# Allegro board ADF4351_PCB.brd
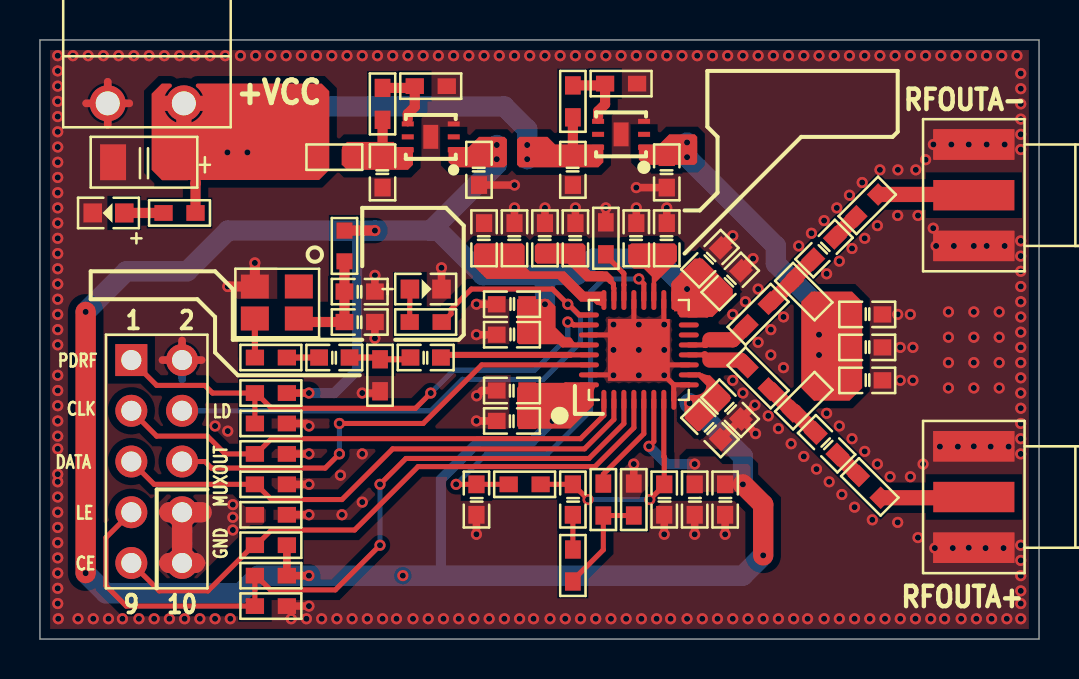
[diagram p0: board, top side]
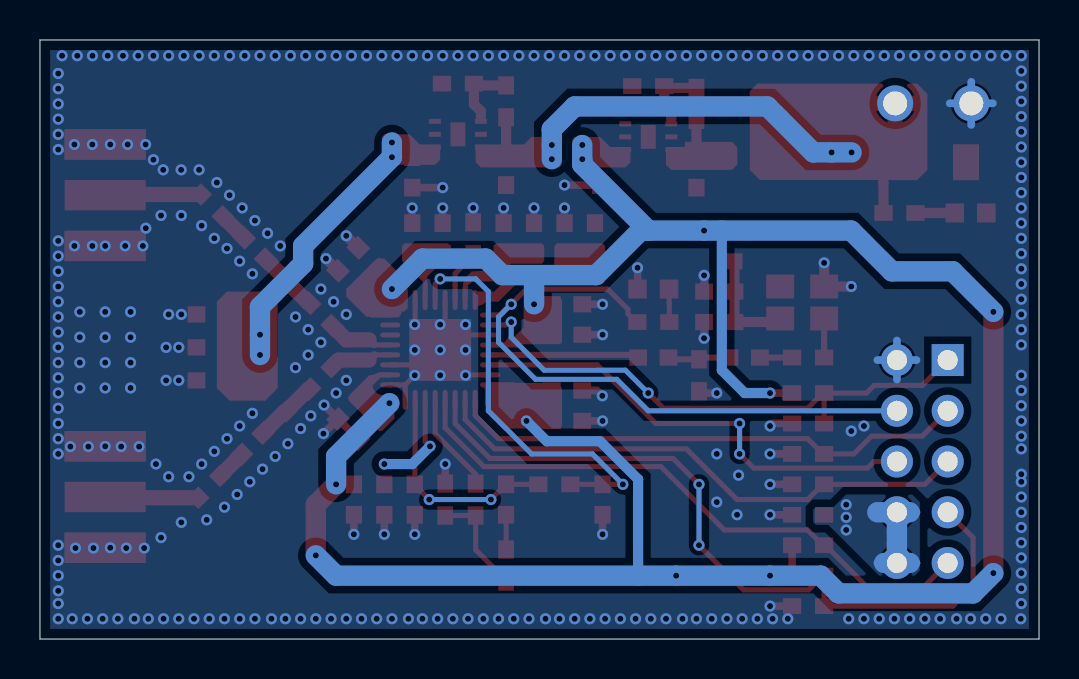
[diagram p1: board, bottom side, seen from below]

Outline 50 x 30 mm; copper layers: TOP, BOTTOM. Coordinates in mm from the lower left corner of the outline.
Outline path: 0,30 0,0 50,0 50,30 0,30

## Design rules (mm)
net group PWR: nets N01903 VCC_5V VOUT

## Placement (name value [footprint] x y rotation side)
BNC1  BNC  [BNC5_2R54_7R7_SM_V]  46.74 7.11 180 top
BNC2  BNC  [BNC5_2R54_7R7_SM_V]  46.74 22.23 180 top
C1  0.47uF/C0603  [C0603]  26.67 23.5 270 top
C2  0.47uF/C0603  [C0603]  31.37 23.37 270 top
C3  22uF 16V/TA3216  [TA3216]  5.21 23.88 180 top
C4  0.47uF/C0603  [C0603]  17.14 23.37 270 top
C5  0.47uF/C0603  [C0603]  21.97 23.5 270 top
C6  1uF/C0603  [C0603]  16 17.4 0 top
C7  100pF/C0603  [C0603]  16 15.88 0 top
C8  1nF/C0603  [C0603]  14.73 14.1 0 top
C9  1nF/C0603  [C0603]  19.3 14.1 0 top
C10  680pF/C0603  [C0603]  21.84 6.99 90 top
C11  47nF/C0603  [C0603]  26.67 6.99 90 top
C12  2.7nF/C0603  [C0603]  31.24 6.99 90 top
C13  10pF/C0603  [C0603]  23.62 12.45 0 top
C14  0.1uF/C0603  [C0603]  23.62 10.92 0 top
C15  10pF/C0603  [C0603]  34.54 11.56 135 top
C16  0.1uF/C0603  [C0603]  33.53 10.54 135 top
C17  120pF/C0603  [C0603]  41.4 12.95 180 top
C18  0.1uF/C0603  [C0603]  41.4 14.61 180 top
C19  120pF/C0603  [C0603]  41.4 16.26 180 top
C20  1nF/C0603  [C0603]  39.24 19.56 225 top
C21  1nF/C0603  [C0603]  39.37 9.78 135 top
C22  0.1uF/C0603  [C0603]  31.37 20.07 270 top
C23  10pF/C0603  [C0603]  29.84 20.07 270 top
C24  0.1uF/C0603  [C0603]  26.8 20.07 270 top
C25  10pF/C0603  [C0603]  25.27 20.07 270 top
C26  0.1uF/C0603  [C0603]  23.75 20.07 270 top
C27  10pF/C0603  [C0603]  22.23 20.07 270 top
C28  0.1uF/C0603  [C0603]  33.53 19.05 225 top
C29  10pF/C0603  [C0603]  34.54 17.91 225 top
C30  0.1uF/C0603  [C0603]  34.29 6.99 90 top
C31  10pF/C0603  [C0603]  32.77 6.99 90 top
C32  10pF/C0603  [C0603]  23.62 15.24 180 top
C33  0.1uF/C0603  [C0603]  23.62 16.76 180 top
D1  LED  [LED0603]  19.3 17.53 0 top
D2  LED  [LED0603]  3.43 21.34 180 top
J1  PWR  [KF_2EDG_3_81X2]  9.55 25.63 180 top
J2  HEADER 5X2  [HDR_2X5]  4.57 13.97 270 top
L2  3.9nH  [L0603]  38.23 17.4 315 top
L3  3.9nH  [L0603]  38.23 11.94 45 top
L4  1.9nH  [L0603]  41.4 21.72 45 top
L5  1.9nH  [L0603]  41.53 7.62 315 top
LB1  600R/L0603  [L0603]  14.73 24.13 0 top
LB2  600R  [L0603]  15.24 19.68 90 top
NOREF  -  []  50 0 90 top
NOREF#2  -  []  0 0 0 top
R1  0R  [R0603]  26.67 26.92 90 top
R2  DNI  [R0603]  29.08 27.81 0 top
R3  0R  [R0603]  17.14 26.8 90 top
R4  DNI  [R0603]  19.56 27.69 0 top
R5  10K  [R0603]  11.56 1.65 0 top
R6  10K  [R0603]  11.56 7.75 0 top
R7  10K  [R0603]  11.56 9.27 0 top
R8  10K  [R0603]  11.56 4.7 180 top
R9  DIN  [R0603]  11.56 3.17 180 top
R10  0R  [R0603]  11.56 14.1 0 top
R11  DIN/51R  [R0603]  17.02 13.21 90 top
R12  1K  [R0603]  24.26 7.75 0 top
R13  360R  [R0603]  26.67 3.68 90 top
R14  0R  [R0603]  29.72 6.99 90 top
R15  DIN  [R0603]  28.19 6.99 270 top
R16  1K  [R0603]  19.3 15.88 0 top
R17  0R  [R0603]  35.94 16.26 45 top
R18  0R  [R0603]  35.94 13.08 315 top
R19  4K7  [R0603]  28.32 20.07 90 top
R20  DIN  [R0603]  11.56 10.79 0 top
R21  0R  [R0603]  11.56 12.32 0 top
R22  5K1  [R0603]  6.99 21.34 180 top
R23  0R  [R0603]  11.56 6.22 0 top
U1  LP5900SD-3V3/QFN-6  [QFN-6]  29.08 25.27 270 top
U2  LP5900SD-3V3/QFN-6  [QFN-6]  19.56 25.15 270 top
U3  ADF4351  [QFN-32]  29.97 14.48 90 top
Y1  100MHz  [CRY_3225]  12.95 17.65 180 top

## Library data of the parts
BNC1 BNC2 = BNC
C1 C2 C4-C33 = CAP NP
C3 = CAP POL
D1 D2 = LED
J1 = HEADER 2
J2 = HEADER 5X2
L2-L5 = INDUCTANCE
LB1 LB2 = FB
R1-R23 = R
U1 U2 = LP5900SD-3V3
U3 = ADF4351_0
Y1 = XTAL_SMD

## Footprints (pads in the part's own frame, mm; a bottom-side part is the same pattern mirrored in y, then rotated)
BNC5_2R54_7R7_SM_V
  rect 4.059x1.519 smd: 1(0,0) 2(0,2.54) 3(0,-2.54) 4(0,2.54) 5(0,-2.54)
C0603
  rect 0.889x0.813 smd: 1(-0.762,0) 2(0.762,0)
CRY_3225
  rect 1.4x1.199 smd: 1(0,0) 2(2.2,0) 3(2.2,1.6) 4(0,1.6)
HDR_2X5
  rect 1.6x1.6 hole 1.001: 1(0,0)
  round 1.6 hole 1.001: 2(0,2.54) 3(2.54,0) 4(2.54,2.54) 5(5.08,0) 6(5.08,2.54) 7(7.62,0) 8(7.62,2.54) 9(10.16,0) 10(10.16,2.54)
KF_2EDG_3_81X2
  round 1.801 hole 1.199: 1(2.344,-1.199) 2(6.154,-1.199)
L0603
  rect 0.8x0.8 smd: 1(-0.77,0) 2(0.77,0)
LED0603
  rect 0.93x0.95 smd: 1(-0.79,0) 2(0.79,0)
QFN-6
  rect 0.249x0.599 smd: 1(0.65,1.151) 2(0,1.151) 3(-0.65,1.151) 4(-0.65,-1.151) 5(0,-1.151) 6(0.65,-1.151)
  rect 1.199x0.749 smd: 7(0,0)
QFN-32
  oval 1.001x0.249 smd: 1(-2.499,1.75) 2(-2.499,1.25) 3(-2.499,0.749) 4(-2.499,0.249) 5(-2.499,-0.249) 6(-2.499,-0.749) 7(-2.499,-1.25) 8(-2.499,-1.75) 17(2.499,-1.75) 18(2.499,-1.25) 19(2.499,-0.749) 20(2.499,-0.249) 21(2.499,0.249) 22(2.499,0.749) 23(2.499,1.25) 24(2.499,1.75)
  oval 0.249x1.001 smd: 9(-1.75,-2.499) 10(-1.25,-2.499) 11(-0.749,-2.499) 12(-0.249,-2.499) 13(0.249,-2.499) 14(0.749,-2.499) 15(1.25,-2.499) 16(1.75,-2.499) 25(1.75,2.499) 26(1.25,2.499) 27(0.749,2.499) 28(0.249,2.499) 29(-0.249,2.499) 30(-0.749,2.499) 31(-1.25,2.499) 32(-1.75,2.499)
  rect 3.099x3.099 smd: 33(0,0)
R0603
  rect 0.914x0.787 smd: 1(-0.8,0) 2(0.8,0)
TA3216
  rect 1.3x1.801 smd: 1(-1.549,0) 2(1.549,0)

## Nets
AGND: J2.8 J2.10 R23.1
AVDD: C5.1 C13.2 C14.2 C15.2 C16.2 C28.2 C29.2 C30.2 C31.2 C32.1 C33.1 LB2.2 R8.1 R9.1 R21.2 U2.1(VOUT) U3.6(VP) U3.10(AVDD) U3.16(VVCO#16) U3.17(VVCO#17) U3.28(DVDD) U3.32(SDVDD)
GND: BNC1.2(GND#2) BNC1.3(GND#3) BNC1.4(GND#4) BNC1.5(GND#5) BNC2.2(GND#2) BNC2.3(GND#3) BNC2.4(GND#4) BNC2.5(GND#5) C1.2 C2.2 C3.2 C4.2 C5.2 C6.2 C7.2 C10.1 C12.1 C13.1 C14.1 C15.1 C16.1 C17.1 C18.1 C19.1 C22.1 C23.1 C24.1 C25.1 C26.1 C27.1 C28.1 C29.1 C30.1 C31.1 C32.2 C33.2 D1.2(K) D2.2(K) J1.2 J2.2 R2.2 R4.2 R5.2 R6.2 R7.2 R11.1 R14.2 R19.2 R20.2 R23.2 U1.3(GND) U1.7(PGND) U2.3(GND) U2.7(PGND) U3.8(CPGND) U3.9(AGND) U3.11(AGNDVCO#11) U3.18(AGNDVCO#18) U3.21(AGNDVCO#21) U3.27(DGND) U3.31(SDGND) U3.33(EP) Y1.2(GND)
VCC_5V: C1.1 C3.1 J1.1 LB1.1 R1.1 R22.1 U1.6(VIN)
CE: J2.9 R8.2 U3.4(CE)
CLK: J2.3 R7.1 U3.1(CLK)
DATA: J2.5 R6.1 U3.2(DATA)
LD: J2.4 R16.2 U3.25(LD)
LE: J2.7 R5.1 R9.2 U3.3(LE)
MUXOUT: J2.6 U3.30(MUXOUT)
PDRF: J2.1 R20.1 R21.1 U3.26(PDBRF)
VOUT: C2.1 C17.2 C18.2 C19.2 L2.2 L3.2 U1.1(VOUT)
VTURE: C10.2 R12.1 U3.20(VTUNE)
N00255: R1.2 R2.1 U1.4(EN)
N01903: C4.1 LB1.2 R3.1 U2.6(VIN)
N01947: R3.2 R4.1 U2.4(EN)
N05770: C6.1 C7.1 LB2.1 Y1.4(VDD)
N06260: R10.1 Y1.3(OUT)
N06365: C8.1 R10.2
N06469: C8.2 C9.1 R11.2
N07492: C26.2 C27.2 U3.24(VREF)
N07512: R18.1 U3.12(RFOUT_A+)
N07516: R17.1 U3.13(RFOUT_A-)
N07532: C11.2 C12.2 R12.2 U3.7(CPOUT)
N08642: C11.1 R13.2
N09181: R13.1 R14.1 R15.2
N09630: R15.1 U3.5(SW)
N10048: C9.2 U3.29(REFIN)
N12021: D1.1(A) R16.1
N15465: C20.2 L2.1 R17.2
N15469: C21.2 L3.1 R18.2
N16989: C20.1 L4.1
N16993: C21.1 L5.1
N18121: BNC1.1 L5.2
N18593: BNC2.1 L4.2
N20810: C22.2 C23.2 U3.19(TEMP)
N21612: C24.2 C25.2 U3.23(VCOM)
N23952: R19.1 U3.22(RSET)
N29164: D2.1(A) R22.2

Pads without a net: U1 2 5; U2 2 5; U3 14 15; Y1 1

## Via types
v1: diameter 0.559, hole 0.305, TOP to BOTTOM, 356 vias

## Routing (per net, layer and track width the routed paths; a pad name or vN(x,y) marks a point on that pad's centre or on a via; arc(x,y) is an arc through that point)
AGND: length 12.9
  TOP w0.381: 8.09,3.81 7.75,3.81 ; 6.13,6.35 6.48,6.35 ; 6.13,3.81 6.48,3.81
  TOP w1.016: J2.8 8.09,6.35 ; J2.8 6.48,6.35 ; J2.8 J2.10 ; 7.75,3.81 J2.10 ; J2.10 6.48,3.81
  BOTTOM w0.381: 6.48,3.81 6.13,3.81 ; 6.48,6.35 6.13,6.35 ; 7.75,3.81 8.09,3.81
  BOTTOM w1.016: J2.8 J2.10 ; J2.8 8.09,6.35 ; J2.8 6.48,6.35 ; J2.10 6.48,3.81 ; J2.10 7.75,3.81
  vias: v1(9.65,6.73) v1(9.65,6.1) v1(9.65,5.46)
AVDD: length 137.3
  TOP w0.254: U3.17 31.72,17.75 31.88,17.91 ; 33.66,16.51 33.37,16.23 U3.16 ; C15.2 33.51,12.59 33.51,12.72 33,13.23 U3.10 ; v1(30.48,9.65) 30.72,9.89 U3.6 ; 26.16,12.57 26.32,12.73 U3.32 ; 25.97,14.92 26.17,14.73 U3.28
  TOP w0.381: R21.2 v1(13.46,12.32) ; R8.1 R9.1 v1(13.46,3.17)
  TOP w0.508: LB2.2 v1(16.76,20.45)
  TOP w1.016: v1(2.29,16.38) v1(2.29,3.3) ; v1(36.2,4.19) 36.2,6.73 v1(35.18,7.75)
  BOTTOM w0.508: v1(13.46,12.32) 14.73,12.32 15.88,13.46 15.88,20.45 ; v1(32.77,8.76) 31.37,8.76 v1(30.48,9.65) ; v1(25.65,10.92) 24.64,9.91 21.97,9.91 20.07,8 20.07,3.17
  BOTTOM w1.016: 19.55,20.45 22.86,23.76 v1(22.86,24.03) v1(22.86,24.74) ; 19.55,20.45 v1(16.76,20.45) 9.41,20.45 7.37,18.41 4.32,18.41 v1(2.29,16.38) ; 19.55,20.45 19.93,20.45 22.16,18.22 25.27,18.22 ; v1(2.29,3.3) 3.3,2.29 10.03,2.29 10.92,3.17 v1(13.46,3.17) v1(18.16,3.17) 35.18,3.17 v1(36.2,4.19) ; v1(32.38,17.53) 30.86,19.05 27.69,19.05 26.86,18.22 25.27,18.22 ; 25.27,18.22 v1(25.27,16.76) ; v1(35.18,7.75) 35.18,9.14 v1(32.51,11.81)
GND: length 65.8
  TOP w0.254: 31.72,12.73 31.72,11.98 U3.8 ; 31.72,12.73 32.47,12.73 U3.9 ; 31.72,12.73 v1(31.24,13.21) 30.72,13.73 ; v1(29.97,14.48) 29.72,14.73 ; v1(29.97,14.48) 28.72,13.23 U3.31 ; v1(29.97,14.48) 30.72,13.73 ; v1(29.97,14.48) 31.22,15.73 U3.18 ; 29.72,14.73 U3.21 ; 29.72,14.73 29.22,15.23 U3.27 ; 30.72,13.73 U3.11
  TOP w0.381: J1.2 3.39,27.9 ; J1.2 3.39,25.75 ; J1.2 4.47,26.82 ; J1.2 2.31,26.82 ; 20.09,17.78 v1(20.09,18.59) ; R20.2 13.34,10.79 v1(13.46,10.67) ; R23.2 v1(13.46,6.22) ; J2.2 8.09,13.97 ; J2.2 7.11,14.95 ; J2.2 6.13,13.97 ; C16.1 C15.1 ; C15.1 v1(35.78,11.72) ; C15.1 v1(35.81,10.29) ; C7.2 v1(16.76,15.06) ; C5.2 v1(23.75,22.73) ; C26.1 v1(23.75,21.59) ; C13.1 22.12,12.45 v1(21.86,12.18) ; C25.1 v1(25.27,21.59) ; C30.1 v1(34.29,5.25) ; C33.2 v1(21.84,16.76) ; R5.2 v1(13.46,1.65) ; v1(16.13,12.32) 16.93,12.32 R11.1 ; C22.1 v1(31.37,21.59) ; C14.1 v1(21.84,10.92) ; C6.2 v1(16.76,18.21) ; R19.2 v1(28.32,21.59) ; C10.1 v1(21.84,5.25) ; C24.1 v1(26.8,21.59) ; C12.1 v1(31.24,5.25) ; R7.2 v1(13.46,9.27) ; C23.1 v1(29.84,21.59) ; C2.2 v1(29.84,22.61) ; R14.2 v1(29.72,8.76) ; R6.2 v1(13.46,7.75) ; C31.1 v1(32.77,5.25) ; C32.2 v1(21.84,15.24)
  TOP w0.508: C28.1 v1(34.67,20.19) ; v1(10.75,18.84) Y1.2 v1(9.4,17.65) ; C29.1 v1(35.69,19.05)
  BOTTOM w0.381: J1.2 4.47,26.82 ; J1.2 2.31,26.82 ; J1.2 3.39,25.75 ; J1.2 3.39,27.9 ; 7.11,12.99 J2.2 ; J2.2 7.11,14.95 ; J2.2 6.13,13.97 ; J2.2 8.09,13.97
  vias: v1(0.89,29.21) v1(0.89,28.45) v1(0.89,27.69) v1(0.89,26.92) v1(0.89,26.16) v1(0.89,25.4) v1(0.89,24.64) v1(0.89,23.88) v1(0.89,23.11) v1(0.89,22.35) v1(0.89,21.59) v1(0.89,20.83) v1(0.89,20.07) v1(0.89,19.3) v1(0.89,18.54) v1(0.89,17.78) v1(0.89,17.02) v1(0.89,16.26) v1(0.89,15.49) v1(0.89,14.73) v1(0.89,13.21) v1(0.89,12.45) v1(0.89,11.68) v1(0.89,10.92) v1(0.89,10.16) v1(0.89,9.53) v1(0.89,8.26) v1(0.89,7.87) v1(0.89,7.11) v1(0.89,6.35) v1(0.89,5.59) v1(0.89,4.83) v1(0.89,4.06) v1(0.89,3.3) v1(0.89,2.54) v1(0.89,1.78) v1(0.91,1.02) v1(1.65,29.21) v1(1.91,1.02) v1(2.41,29.21) v1(2.67,1.02) v1(3.17,29.21) v1(3.43,1.02) v1(3.94,29.21) v1(4.13,1.02) v1(4.7,29.21) v1(4.95,1.02) v1(5.46,29.21) v1(5.71,1.02) v1(6.22,29.21) v1(6.48,1.02) v1(6.99,29.21) v1(7.24,1.02) v1(7.75,29.21) v1(8,1.02) v1(8.51,29.21) v1(8.76,10.67) v1(8.76,1.02) v1(9.27,29.21) v1(9.4,10.41) v1(9.53,1.02) v1(10.03,29.21) v1(10.79,29.21) v1(11.56,29.21) v1(12.32,29.21) v1(12.57,1.02) v1(13.08,29.21) v1(13.34,1.02) v1(13.84,29.21) v1(14.1,1.02) v1(14.61,29.21) v1(14.86,1.02) v1(15.04,8.2) v1(15.11,6.22) v1(15.37,29.21) v1(15.62,1.02) v1(16.13,29.21) v1(16.13,9.27) v1(16.13,6.86) v1(16.38,1.02) v1(16.89,29.21) v1(17.14,1.02) v1(17.65,29.21) v1(17.84,1.02) v1(18.41,29.21) v1(18.67,1.02) v1(19.18,29.21) v1(19.43,1.02) v1(19.94,29.21) v1(20.19,1.02) v1(20.7,29.21) v1(20.95,1.02) v1(21.46,29.21) v1(21.72,1.02) v1(22.23,29.21) v1(22.48,1.02) v1(22.99,29.21) v1(23.24,1.02) v1(23.75,29.21) v1(24,1.02) v1(24.51,29.21) v1(24.7,1.02) v1(25.27,29.21) v1(25.53,1.02) v1(26.04,29.21) v1(26.29,1.02) v1(26.8,29.21) v1(27.05,1.02) v1(27.56,29.21) v1(27.81,1.02) v1(28.32,29.21) v1(28.57,1.02) v1(28.7,15.75) v1(28.7,14.48) v1(28.7,13.21) v1(29.08,29.21) v1(29.34,1.02) v1(29.84,29.21) v1(29.97,15.75) v1(29.97,13.21) v1(30.1,1.02) v1(30.61,29.21) v1(30.86,1.02) v1(31.24,15.75) v1(31.24,14.48) v1(31.37,29.21) v1(31.56,1.02) v1(32.13,29.21) v1(32.38,1.02) v1(32.89,29.21) v1(33.15,1.02) v1(33.66,29.21) v1(33.91,1.02) v1(34.42,29.21) v1(34.67,16.26) v1(34.67,12.95) v1(34.67,1.02) v1(35.18,29.21) v1(35.18,12.32) v1(35.31,16.89) v1(35.43,1.02) v1(35.94,29.21) v1(35.94,17.53) v1(35.94,14.86) v1(36.2,1.02) v1(36.45,11.18) v1(36.58,15.49) v1(36.58,14.22) v1(36.7,29.21) v1(36.96,10.54) v1(36.96,1.02) v1(37.21,16.13) v1(37.21,13.59) v1(37.47,29.21) v1(37.59,9.78) v1(37.72,1.02) v1(37.97,19.68) v1(38.23,29.21) v1(38.23,9.14) v1(38.42,1.02) v1(38.61,20.32) v1(38.86,8.51) v1(38.99,29.21) v1(39.24,20.95) v1(39.24,1.02) v1(39.37,18.29) v1(39.37,11.3) v1(39.5,7.87) v1(39.75,29.21) v1(39.88,21.59) v1(40.01,18.92) v1(40.01,10.67) v1(40.01,1.02) v1(40.13,7.24) v1(40.51,29.21) v1(40.51,22.23) v1(40.64,19.56) v1(40.64,10.03) v1(40.77,6.6) v1(40.77,1.02) v1(41.15,22.86) v1(41.27,29.21) v1(41.27,20.07) v1(41.27,9.4) v1(41.53,1.02) v1(41.66,5.97) v1(41.91,20.7) v1(41.91,8.76) v1(42.04,29.21) v1(42.04,23.5) v1(42.29,1.02) v1(42.55,8.13) v1(42.8,29.21) v1(42.94,23.5) v1(42.93,21.21) v1(42.93,16.26) v1(42.93,5.84) v1(43.05,14.61) v1(43.05,12.95) v1(43.05,1.02) v1(43.56,29.21) v1(43.56,16.26) v1(43.56,8.13) v1(43.69,14.61) v1(43.69,12.95) v1(43.83,23.5) v1(43.81,1.02) v1(43.94,21.21) v1(43.94,5.08) v1(44.2,8.76) v1(44.32,29.21) v1(44.32,24) v1(44.58,1.02) v1(44.71,24.77) v1(44.7,20.57) v1(44.85,19.68) v1(44.78,4.56) v1(45.04,9.64) v1(45.09,29.21) v1(45.28,1.02) v1(45.47,16.38) v1(45.47,15.11) v1(45.47,13.84) v1(45.47,12.57) v1(45.61,24.77) v1(45.74,19.68) v1(45.68,4.56) v1(45.85,29.21) v1(45.94,9.64) v1(46.1,1.02) v1(46.48,24.77) v1(46.48,4.57) v1(46.61,29.21) v1(46.74,19.68) v1(46.74,16.38) v1(46.74,15.11) v1(46.74,13.84) v1(46.74,12.57) v1(46.74,9.65) v1(46.86,1.02) v1(47.32,4.56) v1(47.37,29.21) v1(47.38,24.77) v1(47.38,19.68) v1(47.58,9.64) v1(47.62,1.02) v1(48.01,16.38) v1(48.01,15.11) v1(48.01,13.84) v1(48.01,12.57) v1(48.13,29.21) v1(48.22,4.56) v1(48.28,24.77) v1(48.28,19.68) v1(48.39,1.02) v1(48.48,9.64) v1(48.9,29.21) v1(49.09,28.32) v1(49.09,27.56) v1(49.09,26.8) v1(49.09,26.04) v1(49.09,25.27) v1(49.09,24.51) v1(49.09,19.94) v1(49.09,19.18) v1(49.09,18.41) v1(49.09,17.65) v1(49.09,16.89) v1(49.09,16.13) v1(49.09,15.37) v1(49.09,14.61) v1(49.09,13.84) v1(49.09,13.08) v1(49.09,12.32) v1(49.09,11.56) v1(49.09,10.79) v1(49.09,10.03) v1(49.09,9.27) v1(49.09,4.7) v1(49.09,3.94) v1(49.09,3.17) v1(49.09,2.41) v1(49.09,1.78) v1(49.09,1.02)
VCC_5V: length 25.1
  TOP w0.508: C1.1 R1.1 ; R22.1 7.79,22.82 7.79,22.82 7.79,23.28 7.87,23.37
  TOP w0.762: J1.1 7.2,25.75 ; J1.1 6.12,26.82 ; J1.1 8.28,26.82
  BOTTOM w1.016: v1(24.38,24.03) v1(24.38,24.74) 24.38,25.53 23.24,26.67 13.6,26.67 11.3,24.37 v1(10.38,24.37) v1(9.38,24.37)
CE: length 30.5
  TOP w0.254: J2.9 5.97,2.41 8.41,2.41 10.69,4.7 R8.2 10.82,4.7 11.58,5.46 15.75,5.46 18.92,8.64 27.78,8.64 29.72,10.58 U3.4
CLK: length 26.1
  TOP w0.254: J2.3 5.84,10.16 8.38,10.16 9.27,9.27 R7.1 10.82,9.27 11.58,10.03 27.05,10.03 28.22,11.2 U3.1
DATA: length 27.6
  TOP w0.254: U3.2 28.72,11 27.25,9.53 17.65,9.53 15.11,6.99 11.58,6.99 10.82,7.75 R6.1 5.71,7.75 J2.5
LD: length 32.3
  TOP w0.254: R16.2 20.17,15.88 20.57,16.28 20.57,16.51 21.59,17.53 25.65,17.53 v1(26.42,16.76) 26.46,16.76 27,16.23 U3.25
  BOTTOM w0.254: J2.4 19.56,11.43 21.13,13 25.2,13 27.05,14.86 27.05,16.13 v1(26.42,16.76)
LE: length 38.8
  TOP w0.254: v1(17.02,7.75) 18.31,9.04 27.48,9.04 29.22,10.79 U3.3 ; J2.7 3.3,5.08 3.3,2.67 4.32,1.65 R5.1 R9.2 10.82,3.17 11.53,2.46 14.78,2.46 v1(17.02,4.7)
  BOTTOM w0.254: v1(17.02,4.7) v1(17.02,7.75)
MUXOUT: length 23.5
  TOP w0.254: U3.30 22.11,13.73 19.18,10.79 v1(14.99,10.79) ; J2.6 8.26,8.89 8.58,8.56 14.28,8.56 v1(14.99,9.27)
  BOTTOM w0.254: v1(14.99,9.27) v1(14.99,10.79)
PDRF: length 27.7
  TOP w0.254: R21.1 10.82,12.32 11.58,11.56 18.8,11.56 v1(19.56,12.32) ; R21.1 R20.1 ; R21.1 8.64,12.32 8.26,12.7 5.84,12.7 J2.1 ; U3.26 26.71,15.73 26.69,15.75 26.67,15.75 26.54,15.88 v1(26.42,15.88)
  BOTTOM w0.254: v1(19.56,12.32) 20.7,13.46 24.77,13.46 26.42,15.11 v1(26.42,15.88)
VOUT: length 13.4
  BOTTOM w1.016: v1(38.99,14.22) v1(38.99,15.24) 38.99,16.64 36.83,18.8 36.83,19.68 v1(32.38,24.13) v1(32.38,24.87)
VTURE: length 20.7
  TOP w0.254: v1(29.97,18.03) 30.22,17.79 U3.20 ; R12.1 C10.2 v1(20.83,7.75)
  BOTTOM w0.254: v1(29.97,18.03) 28.19,18.03 27.56,17.4 27.56,11.43 25.4,9.27 22.35,9.27 v1(20.83,7.75)
N00255: length 3.7
  TOP w0.254: U1.4 27.93,26.16
  TOP w0.508: R1.2 28.19,27.72 R2.1 28.28,26.78 27.93,26.43 27.93,26.16
N01903: length 1.4
  TOP w0.508: 17.14,24.64 R3.1
N01947: length 3.7
  TOP w0.254: U2.4 18.41,26.04
  TOP w0.508: 18.41,26.04 18.41,26.3 18.76,26.65 R4.1 18.67,27.6 R3.2
N05770: length 5.4
  TOP w0.508: LB2.1 C6.1 C7.1 13.13,15.88 Y1.4
N06260: length 2
  TOP w0.305: Y1.3 10.75,14.77 10.76,14.77 R10.1
N06365: length 1.6
  TOP w0.305: R10.2 C8.1
N06469: length 3.1
  TOP w0.305: C9.1 18.45,14.01 R11.2 16.93,14.1 C8.2
N07492: length 0.4
  TOP w0.254: U3.24 27.85,16.98
N07512: length 3.1
  TOP w0.254: 33.27,14.23 U3.12
  TOP w0.381: 33.53,13.97 33.27,14.23
  TOP w0.762: R18.1 35.05,13.97 33.53,13.97
N07516: length 3.3
  TOP w0.254: 33.29,14.76 33.26,14.76 33.23,14.73 U3.13
  TOP w0.381: 33.53,14.99 33.3,14.76 33.29,14.76
  TOP w0.762: R17.1 34.67,14.99 33.53,14.99
N07532: length 11.1
  TOP w0.254: R12.2 C11.2 v1(27.43,6.99) ; U3.7 31.22,9.14 31.24,9.12 C12.2 31.24,7.71 v1(30.52,6.99)
  BOTTOM w0.254: v1(27.43,6.99) v1(30.52,6.99)
N08642: length 1.7
  TOP w0.254: C11.1 R13.2
N09181: length 5.5
  TOP w0.254: R14.1 R15.2 28.19,4.47 26.67,2.95 R13.1
N09630: length 5
  TOP w0.254: R15.1 28.19,8.26 30.22,10.28 U3.5
N10048: length 7.5
  TOP w0.254: 26.54,14.23 U3.29
  TOP w0.305: 26.54,14.23 20.2,14.23 C9.2
N12021: length 1.7
  TOP w0.254: R16.1 18.5,16.79 18.51,16.8 D1.1
N15465: length 3.1
  TOP w0.762: C20.2 37.68,18 L2.1 36.56,16.82 R17.2
N15469: length 3.2
  TOP w0.762: R18.2 36.56,12.52 L3.1 37.76,11.39 C21.2
N16989: length 1.5
  TOP w0.762: C20.1 L4.1
N16993: length 1.5
  TOP w0.762: C21.1 L5.1
N18121: length 4.7
  TOP w0.762: L5.2 46.7,7.08 BNC1.1
N18593: length 4.8
  TOP w0.762: L4.2 46.7,22.26 BNC2.1
N20810: length 0.8
  TOP w0.254: U3.19 30.72,17.77
N21612: length 1.2
  TOP w0.254: U3.23 28.72,17.56 28.7,17.58 28.7,17.78 28.45,18.03
N23952: length 2.7
  TOP w0.254: U3.22 29.22,17.73 29.22,18.3 29.18,18.34 29.18,18.34 28.32,19.2 R19.1
N29164: length 2
  TOP w0.508: R22.2 D2.1

## Copper pours and planes (outline as drawn; the poured copper is in the pictures)
AGND on TOP, BOTTOM: 5.97,6.86 6.35,7.24 9.65,7.24 10.29,6.6 11.18,6.6 11.3,6.48 11.3,5.84 11.18,5.71 10.54,5.71 7.87,3.05 6.35,3.05 5.97,3.43
AVDD on TOP (solid shape): 23.37,25.02 23.37,23.75 23.24,23.62 20.7,23.62 20.45,23.88 20.45,24.64 21.46,24.64 21.97,25.15 23.24,25.15
AVDD on TOP (solid shape): 25.8,16.66 25.8,15.6 26.29,15.11 26.54,15.11 26.63,15.02 26.68,14.94 26.73,14.88 26.8,14.82 26.8,14.74 26.71,14.74 26.62,14.76 26.54,14.76 23.97,14.76 23.88,14.86 23.88,17.02 25.44,17.02
AVDD on TOP (solid shape): 26.79,12.83 26.93,12.75 27.1,12.72 27.47,12.72 27.79,12.72 27.81,12.7 27.81,12.65 27.8,12.64 27.74,12.5 27.72,12.35 27.71,11.98 27.71,11.71 26.54,10.54 24,10.54 23.88,10.67 23.88,12.57 24.13,12.83
AVDD on TOP (solid shape): 34.67,17.53 34.67,17.14 33.66,16.13 33.16,16.13 33.01,16.21 32.85,16.23 32.1,16.23 32.06,16.23 32.02,16.23 31.94,16.25 31.9,16.33 31.9,16.41 31.73,16.41 31.73,16.98 31.73,17.35 31.7,17.51 31.63,17.65 31.62,17.66 31.62,17.88 32,18.26 32,18.29 32.77,19.05 33.15,19.05
AVDD on TOP (solid shape): 33.32,13.24 33.51,13.21 33.53,13.21 34.54,12.19 34.54,11.94 33.02,10.41 32.89,10.41 32.26,11.05 32.26,11.94 32.54,12.22 32.85,12.22 33.34,12.61 33.07,13.18 33.04,13.23 33.07,13.27 33.1,13.29 33.14,13.31
AVDD on TOP: 32.38,7.37 32.38,9.02 32.51,9.14 33.78,9.14 34.16,8.76 35.43,8.76 35.56,8.64 35.56,7.49 35.43,7.37
GND on TOP: 0.51,0.51 0.51,29.49 49.49,29.49 49.49,0.51 ; 4 cut-outs
GND on BOTTOM: 0.51,0.51 0.51,29.49 49.49,29.49 49.49,0.51 ; 1 cut-out
VCC_5V on TOP (solid shape): 25.78,24.77 28.19,24.77 28.19,23.88 27.94,23.62 24,23.62 23.88,23.75 23.88,25.02 24,25.15 25.4,25.15
VCC_5V on TOP (solid shape): 6.5,27.81 6.6,27.74 6.56,27.63 7.2,25.8 7.84,27.63 7.8,27.74 7.9,27.81 14.1,27.81 14.48,27.43 14.48,23.5 13.97,22.99 6.1,22.99 5.59,23.5 5.59,27.3 6.1,27.81
VOUT on TOP (solid shape): 41.15,16.89 41.15,12.57 40.51,11.94 38.73,11.94 38.1,12.57 38.1,16.89 38.61,17.4 40.64,17.4
VOUT on TOP (solid shape): 32.89,25.15 32.89,23.88 32.77,23.75 30.23,23.75 29.97,24 29.97,24.77 30.99,24.77 31.5,25.27 32.77,25.27
N01903 on TOP (solid shape): 17.73,24.64 18.03,24.64 18.03,24.64 18.67,24.64 18.67,23.75 18.41,23.5 15.37,23.5 15.11,23.75 15.11,24.64 15.37,24.89 17.73,24.89
N07492 on TOP (solid shape): 24.26,19.68 24.26,18.67 24.51,18.41 26.26,18.41 27.27,17.4 28.21,17.4 28.21,16.98 28.22,16.93 28.22,16.77 28.17,16.69 28.07,16.68 27.96,16.72 27.85,16.73 27.69,16.89 27.05,16.89 25.91,18.03 22.35,18.03 21.72,18.67 21.72,19.68 21.84,19.81 24.13,19.81
N20810 on TOP (solid shape): 31.88,19.68 31.88,18.92 30.84,17.88 30.84,17.68 30.8,17.64 30.72,17.6 30.64,17.64 30.62,17.66 30.62,18.15 30.23,18.54 29.72,18.54 29.46,18.8 29.46,19.68 29.59,19.81 31.75,19.81
N21612 on TOP (solid shape): 27.3,19.68 27.3,18.67 27.55,18.43 28.18,18.43 28.19,18.41 28.39,18.41 28.71,18.09 28.71,17.78 28.49,17.78 28.48,17.79 28.36,17.91 27.3,17.91 26.42,18.8 24.89,18.8 24.77,18.92 24.77,19.68 24.89,19.81 27.18,19.81

## Text on the board
User.Comments: CR_PWR_2
Ref Des/Silkscreen Top: DATA | PDRF | CLK | LE | CE | LD | MUXOUT | GND | RFOUTA+ | RFOUTA- | +VCC
DIMENSION: FIGURE | SIZE | 12.0 | 39.4 | 47.2 | DRILL CHART: TOP to BOTTOM | ALL UNITS ARE IN MILS | PLATED | QTY | 356 | 9 | 1 | 2
